# Altium PCB ECG_PCB.PcbDoc
Units mm, origin at the board's own origin, x right, y up, seen from the top; angles counter-clockwise.
Board outline 31.48 x 31.83 mm, 2 copper layers (Top Layer, Bottom Layer); 20 components, 16 nets, 54 pads, 1 vias.
Unrouted connection lines stored in the file: 11.
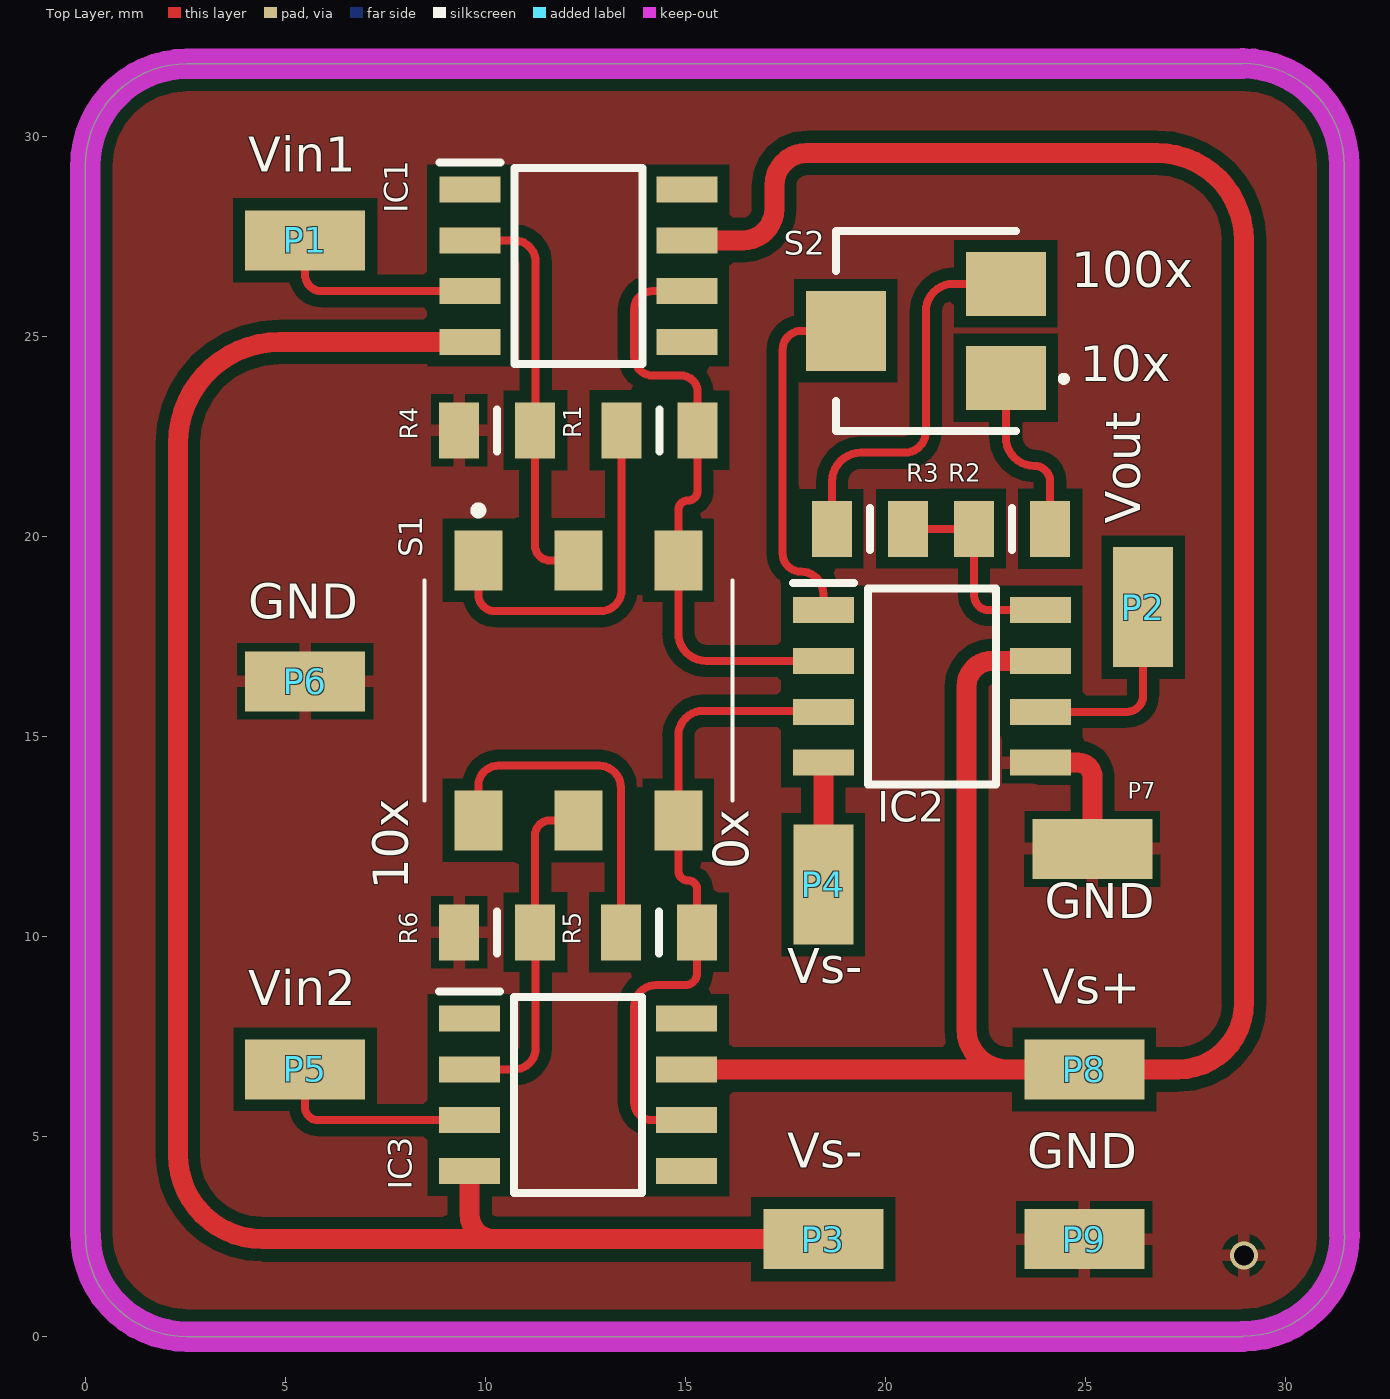
[diagram p0: Top Layer view]
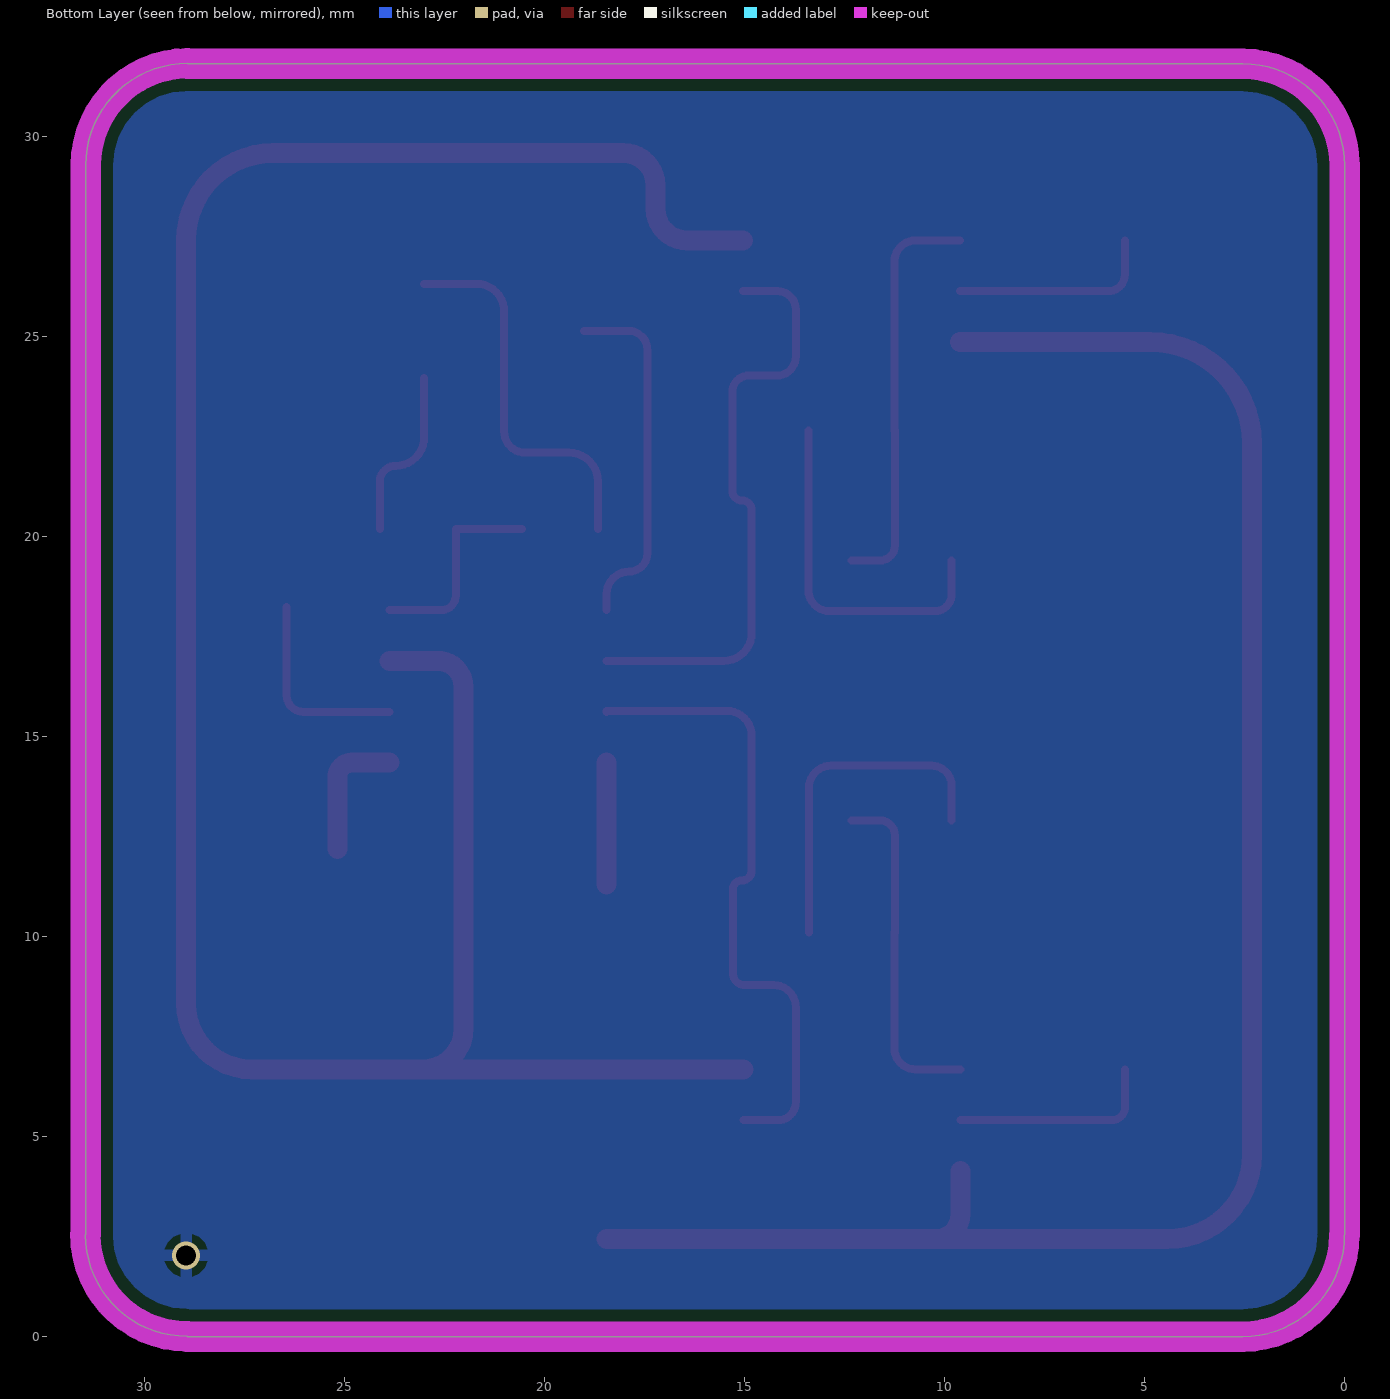
[diagram p1: Bottom Layer view, seen from below]
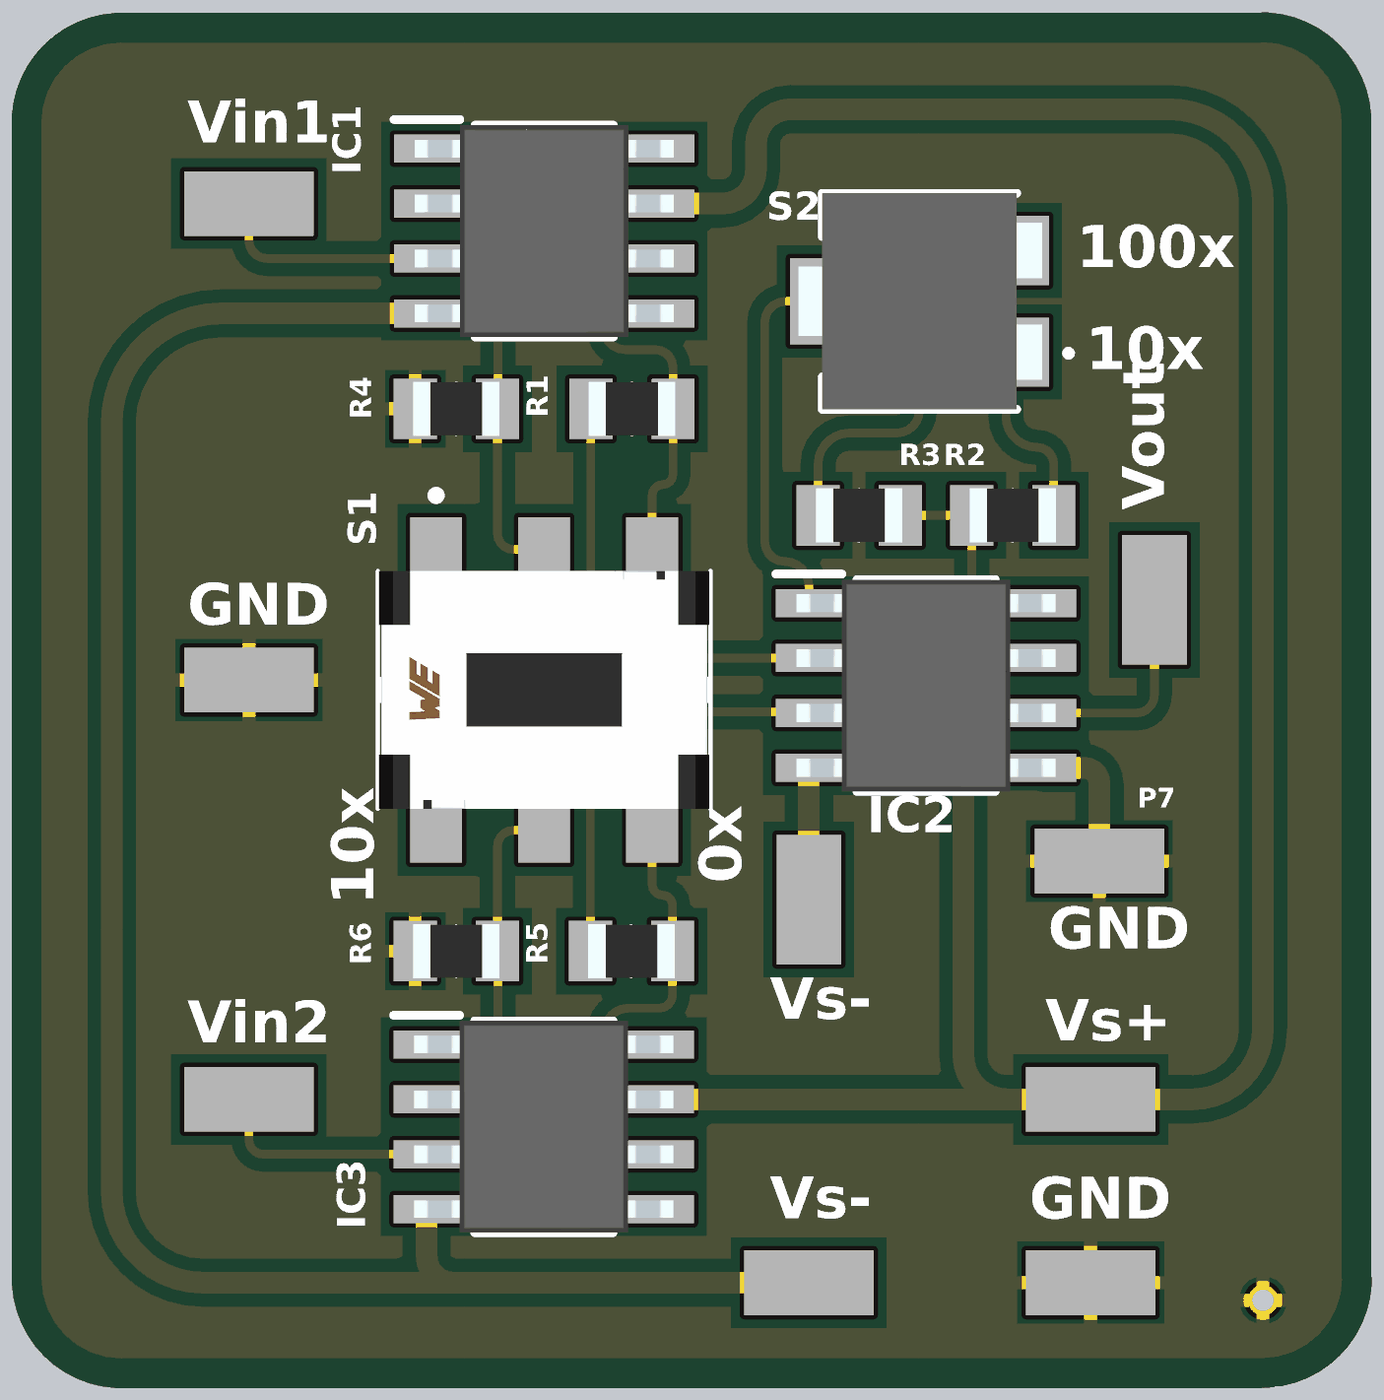
[diagram p2: 3D render of the assembled board from above, using the file's embedded part models]

## Layer stack, top to bottom
Top Solder: solder mask 0.0102, Solder Resist, Dk 3.5
Top Layer: signal copper 0.0356
Dielectric 1: dielectric 0.32, FR-4, Dk 4.8
Bottom Layer: signal copper 0.0356
Bottom Solder: solder mask 0.0102, Solder Resist, Dk 3.5

## Board outline
-0.004,2.544 -0.004,29.279 cw(c2.536,29.279) 2.536,31.819 28.912,31.819 28.923,31.83 cw(c28.923,29.29) 31.463,29.29 31.463,2.559 31.475,2.547 cw(c28.935,2.547) 28.935,0.007 28.927,0 2.54,0 cw(c2.54,2.54)

## Design rules (kind name [scope] priority, off if disabled: settings)
Clearance Clearance_1 [All] p1: gap=0.3 ignorepadtopadclearanceinfootprint=FALSE
PolygonConnect [All] p1: connectstyle=Relief reliefconductorwidth=0.3 reliefentries=4 polygonreliefangle="90 Angle" airgapwidth=0.2
RoutingCorners [All] p1: cornerstyle=Round minsetback=2.54 maxsetback=2.54
RoutingTopology [InNet('GND')] p1: topology=Daisy_Simple
RoutingVias [All] p1: holewidth=0.076 width=0.127 viastyle="Through Hole" minholewidth=0.076 minwidth=0.127 maxholewidth=0.076 maxwidth=0.127
SolderMaskExpansion [All] p1: expansion=0.102 istentingtop=FALSE
Width [All] p1: maxlimit=0.5 minlimit=0.2 preferedwidth=0.2 minimp=50.000000 maximp=50.000000 favimp=50.000000
28 further rules are at their usual default settings.

## Components (designator, comment, footprint, x,y, rotation, side; value= is the part's Value field where it differs from the comment)
IC1 "AD8065ARZ" SOIC127P600X175-8N 12.319,26.772 r0 top
IC2 "LT1920IS8#PBF" SOIC127P599X175-8N 21.158,16.256 r0 top
IC3 "AD8065ARZ" SOIC127P600X175-8N 12.312,6.045 r0 top
P1 "Pad" Pad 7.087,26.543 r90 top
P2 "Pad" Pad 25.578,16.637 r0 top
P3 "Pad" Pad 16.846,3.302 r270 top
P4 "Pad" Pad 19.31,12.903 r180 top
P5 "Pad" Pad 7.087,5.817 r90 top
P6 "Pad" Pad 7.087,15.519 r90 top
P7 "Pad" Pad 23.571,13.056 r270 top
P8 "Pad" Pad 26.568,5.817 r90 top
P9 "Pad" Pad 26.568,1.575 r90 top
R1 "CRF0805-FZ-R002ELF" RESC2012X80N 14.351,22.657 r0 top
R2 "CRF0805-FZ-R002ELF" RESC2012X80N 23.165,20.193 r180 top
R3 "CRF0805-FZ-R002ELF" RESC2012X80N 19.609,20.193 r0 top
R4 "CRF0805-FZ-R002ELF" RESC2012X80N 10.287,22.657 r0 top
R5 "CRF0805-FZ-R002ELF" RESC2012X80N 14.341,10.109 r0 top
R6 "CRF0805-FZ-R002ELF" RESC2012X80N 10.287,10.109 r0 top
S1 "452403012014" 452403012014 12.319,16.154 r0 top
S2 "CS-4-12YA" CS412YA 21.006,25.146 r90 top

## Footprints (in the part's own frame and the unit in brackets; to place one, negate y for a bottom-side part, rotate by r counter-clockwise, add the part's x,y. Pads: shape width x height; smd on the part's side, far side on the other; paste and mask are expansions set on the pad)
452403012014 [mm]
  rect 1.2x1.5 smd: 1(-2.5,3.25) 2(0,3.25) 3(2.5,3.25) 4(-2.5,-3.25) 5(0,-3.25) 6(2.5,-3.25)
  silkscreen extent -3.85,-2.75 3.85,4.6, body extent -3.85,-2.75 3.85,2.75, height 4.25
CS412YA [mm]
  rect 1.6x2 smd: 1(-1.175,-2) 2(1.175,-2)
  rect 2x2 smd: 3(0,2)
  silkscreen extent -2.5,-3.5 2.5,2.25, body extent -2.5,-2.84 2.5,2.8, height 2.7
Pad [mm]
  rect 1.5x3 smd: 0(0.864,1.6)
RESC2012X80N [mm]
  rect 1x1.4 smd: 1(-0.95,0) 2(0.95,0)
  silkscreen extent 0,-0.53 0,0.53, body extent -1,-0.63 1,0.63, height 0.8
SOIC127P599X175-8N [mm]
  rect 1.526x0.65 smd: 1(-2.712,1.905) 2(-2.712,0.635) 3(-2.712,-0.635) 4(-2.712,-1.905) 5(2.712,-1.905) 6(2.712,-0.635) 7(2.712,0.635) 8(2.712,1.905)
  silkscreen extent -3.47,-2.45 1.6,2.58, body extent -3,-2.45 3,2.45, height 1.75
SOIC127P600X175-8N [mm]
  rect 1.525x0.65 smd: 1(-2.712,1.905) 2(-2.712,0.635) 3(-2.712,-0.635) 4(-2.712,-1.905) 5(2.712,-1.905) 6(2.712,-0.635) 7(2.712,0.635) 8(2.712,1.905)
  silkscreen extent -3.47,-2.45 1.6,2.58, body extent -3,-2.45 3,2.45, height 1.75

## Part data
IC1 IC3: "Integrated Circuit", Manufacturer_Name="Analog Devices", Mouser Part Number=584-AD8065ARZ, Arrow Part Number=AD8065ARZ, Arrow Price/Stock=https://www.arrow.com/en/products/ad8065arz/analog-devices?region=nac, Datasheet Link=https://datasheet.datasheetarchive.com/originals/distributors/Datasheets-1/DSA-2047.pdf, Height=1.75mm, Manufacturer_Part_Number=AD8065ARZ, Mouser Price/Stock=https://www.mouser.co.uk/ProductDetail/Analog-Devices/AD8065ARZ?qs=%2FtpEQrCGXCyXd34RglYLzQ%3D%3D
IC2: "Integrated Circuit", Manufacturer_Name="Analog Devices", Mouser Part Number=584-LT1920IS8#PBF, Arrow Part Number=LT1920IS8#PBF, Arrow Price/Stock=https://www.arrow.com/en/products/lt1920is8pbf/analog-devices?region=nac, Datasheet Link=https://datasheet.datasheetarchive.com/originals/distributors/SFDatasheet-4/sf-00091026.pdf, Height=1.752mm, Manufacturer_Part_Number=LT1920IS8#PBF, Mouser Price/Stock=https://www.mouser.co.uk/ProductDetail/Analog-Devices/LT1920IS8PBF?qs=ytflclh7QUWOSod6PqfjSg%3D%3D
R1 R2 R3 R4 R5 R6: "Resistor", Manufacturer_Name=Bourns, Mouser Part Number=652-CRF0805FZR002ELF, Arrow Part Number=CRF0805-FZ-R002ELF, Arrow Price/Stock=https://www.arrow.com/en/products/crf0805-fz-r002elf/bourns?region=nac, Datasheet Link=https://www.bourns.com/docs/product-datasheets/CRF.pdf, Height=0.8mm, Manufacturer_Part_Number=CRF0805-FZ-R002ELF, Mouser Price/Stock=https://www.mouser.co.uk/ProductDetail/Bourns/CRF0805-FZ-R002ELF?qs=t7xnP681wgXcQ5vhBgw1Wg%3D%3D
S1: "Switch", Manufacturer_Name="Wurth Elektronik", Mouser Part Number=710-452403012014, Datasheet Link=https://katalog.we-online.de/em/datasheet/452403012014.pdf, Height=3.3mm, Manufacturer_Part_Number=452403012014, Mouser Price/Stock=https://www.mouser.co.uk/ProductDetail/Wurth-Elektronik/452403012014?qs=DvsTirrhYfOi0QxHyAEO3w%3D%3D
S2: "Switch", Manufacturer_Name="NIDEC COPAL", Datasheet Link=https://www.nidec-copal-electronics.com/j/product/detail/00000197/, Height=2.6mm, Manufacturer_Part_Number=CS-4-12YA

## Via types
v1: diameter 0.7, hole 0.5, Top Layer to Bottom Layer, 1 vias

## Nets (pads, with @x,y where several pads share a name; then routed paths per layer and width w, separated by ;. In a path a pad name is that pad's centre, name@x,y a point inside that pad or via, vN(x,y) a via of type N, cw(c..) or ccw(c..) an arc to the next point about the centre after c; other vN are vias at no path point)
"1st Res (1)": IC1.2 R4.2 S1.2 | length 10.4
  Top Layer w0.2: IC1.2 10.709,27.407 cw(c10.709,26.864) 11.252,26.864 11.252,22.657 R4.2 11.237,19.776 ccw(c11.609,19.776) 11.609,19.404 S1.2
"1st Res (2)": IC3.2 R6.2 S1.5 | length 8.6
  Top Layer w0.2: IC3.2 10.719,6.68 ccw(c10.719,7.214) 11.252,7.214 11.252,10.109 R6.2 11.237,12.532 cw(c11.609,12.532) 11.609,12.904 S1.5
"2nd Res": IC2.1 S2.3 | length 8.9
  Top Layer w0.2: IC2.1 18.446,18.562 ccw(c17.882,18.562) 17.882,19.126 cw(c17.882,19.583) 17.424,19.583 17.424,24.667 cw(c17.903,24.667) 17.903,25.146 S2.3
"10 amp (1)": R1.1 S1.1 | length 9
  Top Layer w0.2: S1.1 9.819,18.559 ccw(c10.243,18.559) 10.243,18.136 12.867,18.136 ccw(c12.867,18.67) 13.401,18.67 R1.1
"10 amp (2)": R5.1 S1.4 | length 8.7
  Top Layer w0.2: S1.4 9.819,13.772 cw(c10.322,13.772) 10.322,14.275 12.833,14.275 cw(c12.833,13.722) 13.386,13.722 13.386,10.109 R5.1
"10 amp (2nd)": R2.1 S2.1 | length 4.4
  Top Layer w0.2: S2.1 23.006,22.486 ccw(c23.724,22.486) 23.724,21.768 cw(c23.724,21.377) 24.115,21.377 R2.1
"100 amp (2nd)": R3.1 S2.2 | length 9.6
  Top Layer w0.2: R3.1 18.659,21.373 cw(c19.383,21.373) 19.383,22.098 20.477,22.098 ccw(c20.477,22.627) 21.006,22.627 21.006,25.629 cw(c21.698,25.629) 21.698,26.321 S2.2
"Buffer (1)": IC1.6 IC2.2 R1.2 S1.3 | length 15.2
  Top Layer w0.2: IC1.6 14.173,26.137 ccw(c14.173,25.679) 13.716,25.679 13.716,24.496 ccw(c14.184,24.496) 14.184,24.028 14.885,24.028 cw(c14.885,23.612) 15.301,23.612 R1.2 15.301,21.143 cw(c15.062,21.143) 15.062,20.904 ccw(c15.062,20.661) 14.819,20.661 14.819,20.616 14.819,20.054 14.819,17.591 ccw(c15.519,17.591) 15.519,16.891 IC2.2
"Buffer (2)": IC2.3 IC3.6 R5.2 S1.6 | length 16.2
  Top Layer w0.2: IC3.6 14.165,5.41 cw(c14.165,5.86) 13.716,5.86 13.716,8.242 cw(c14.262,8.242) 14.262,8.788 14.986,8.788 ccw(c14.986,9.093) 15.291,9.093 R5.2 15.291,11.176 ccw(c15.062,11.176) 15.062,11.405 cw(c15.062,11.648) 14.819,11.648 S1.6 14.819,15.022 cw(c15.443,15.022) 15.443,15.646 18.421,15.646 cw(c18.421,15.621) IC2.3
GND: IC2.5 P6.0 P7.0 P9.0 R4.1 R6.1 | length 3.3
  Top Layer w0.5: IC2.5 24.816,14.351 cw(c24.816,13.995) 25.171,13.995 P7.0
  other v1: 28.956,2.032
NetIC2_8: IC2.8 R2.2 R3.2 | length 5.2
  Top Layer w0.2: R3.2 R2.2 22.215,18.527 ccw(c22.581,18.527) 22.581,18.161 IC2.8
Vin1: IC1.3 P1.0 | length 5.2
  Top Layer w0.2: P1.0 5.486,26.553 ccw(c5.903,26.553) 5.903,26.137 IC1.3
Vin2: IC3.3 P5.0 | length 5.2
  Top Layer w0.2: P5.0 5.486,5.74 ccw(c5.817,5.74) 5.817,5.41 IC3.3
Vout: IC2.6 P2.0 | length 5
  Top Layer w0.2: IC2.6 26.035,15.621 ccw(c26.035,16.027) 26.441,16.027 P2.0
Vs+: IC1.7 IC2.7 IC3.7 P8.0 | length 63
  Top Layer w0.5: IC3.7 23.038,6.68 ; IC1.7 16.434,27.407 ccw(c16.434,28.194) 17.221,28.194 17.221,28.784 cw(c18.028,28.784) 18.028,29.591 26.779,29.591 cw(c26.779,27.414) 28.956,27.414 28.956,8.32 cw(c27.316,8.32) 27.316,6.68 P8.0 23.038,6.68 ; IC2.7 22.673,16.896 ccw(c22.668,16.249) 22.022,16.249 22.022,7.696 ccw(c23.038,7.696) 23.038,6.68
Vs-: IC1.4 IC2.4 IC3.4 P3.0 P4.0 | length 49
  Top Layer w0.5: IC3.4 9.6,3.05 ccw(c10.211,3.05) 10.211,2.438 ; IC1.4 4.851,24.867 ccw(c4.851,22.327) 2.311,22.327 2.311,4.547 ccw(c4.42,4.547) 4.42,2.438 10.211,2.438 ; P3.0 10.211,2.438 ; P4.0 IC2.4
pads on no net: IC1.1 IC1.5 IC1.8 IC3.1 IC3.5 IC3.8

## Polygon pours and split planes (outlines as drawn)
GND on Bottom Layer "GND_L02_P001" (solid, pour order 1): 2.536,31.819 ccw(c2.536,29.279) -0.004,29.279 -0.004,2.54 ccw(c2.54,2.54) 2.54,0 28.927,0 ccw(c28.927,2.536) 31.463,2.536 31.463,29.29 ccw(c28.935,29.29) 28.935,31.819 28.912,31.819
GND on Top Layer "GND_L01_P000" (solid, pour order 0): -0.004,29.279 -0.004,2.54 ccw(c2.536,2.54) 2.536,0 28.935,0 ccw(c28.935,2.547) 31.475,2.547 31.475,29.29 ccw(c28.923,29.29) 28.923,31.83 2.536,31.83 ccw(c2.536,29.279)

## Keep-outs
Keep-Out Layer:
  lines w0.762: -0.004,2.544 -0.004,5.084 -0.004,29.279 cw(c2.536,29.279) 2.536,31.819 28.912,31.819 ; 0,2.54 ccw(c2.54,2.54) 2.54,0 28.927,0 ; 28.923,31.83 cw(c28.923,29.29) 31.463,29.29 31.463,5.099 31.463,2.559 ; 28.935,0.007 ccw(c28.935,2.547) 31.475,2.547

## Silkscreen, mask and mechanical layers (free items; w line width, h text height)
Top Overlay:
  text "Vin1" at 4.064,28.829 h1.5
  text "100x" at 24.638,25.935 h1.52
  text "10x" at 24.85,23.585 h1.52
  text "Vout" at 26.658,20.32 h1.5 r90
  text "GND" at 4.064,17.665 h1.5
  text "0x" at 16.878,11.684 h1.52 r90
  text "10x" at 8.369,11.176 h1.52 r90
  text "GND" at 23.978,10.172 h1.5
  text "Vs-" at 17.545,8.542 h1.5
  text "Vs+" at 23.916,8.039 h1.5
  text "Vin2" at 4.064,8.001 h1.5
  text "Vs-" at 17.545,3.932 h1.5
  text "GND" at 23.546,3.925 h1.5